# Altium PCB WCTopping.PcbDoc (part 2 of 2)
Units mil, origin at the board's own origin, x right, y up, seen from the top; angles counter-clockwise.
Board outline 4005 x 4000 mil, 2 copper layers (Top Layer, Bottom Layer), stack 12.8 mil thick; 56 components, 71 nets, 272 pads, 43 vias.
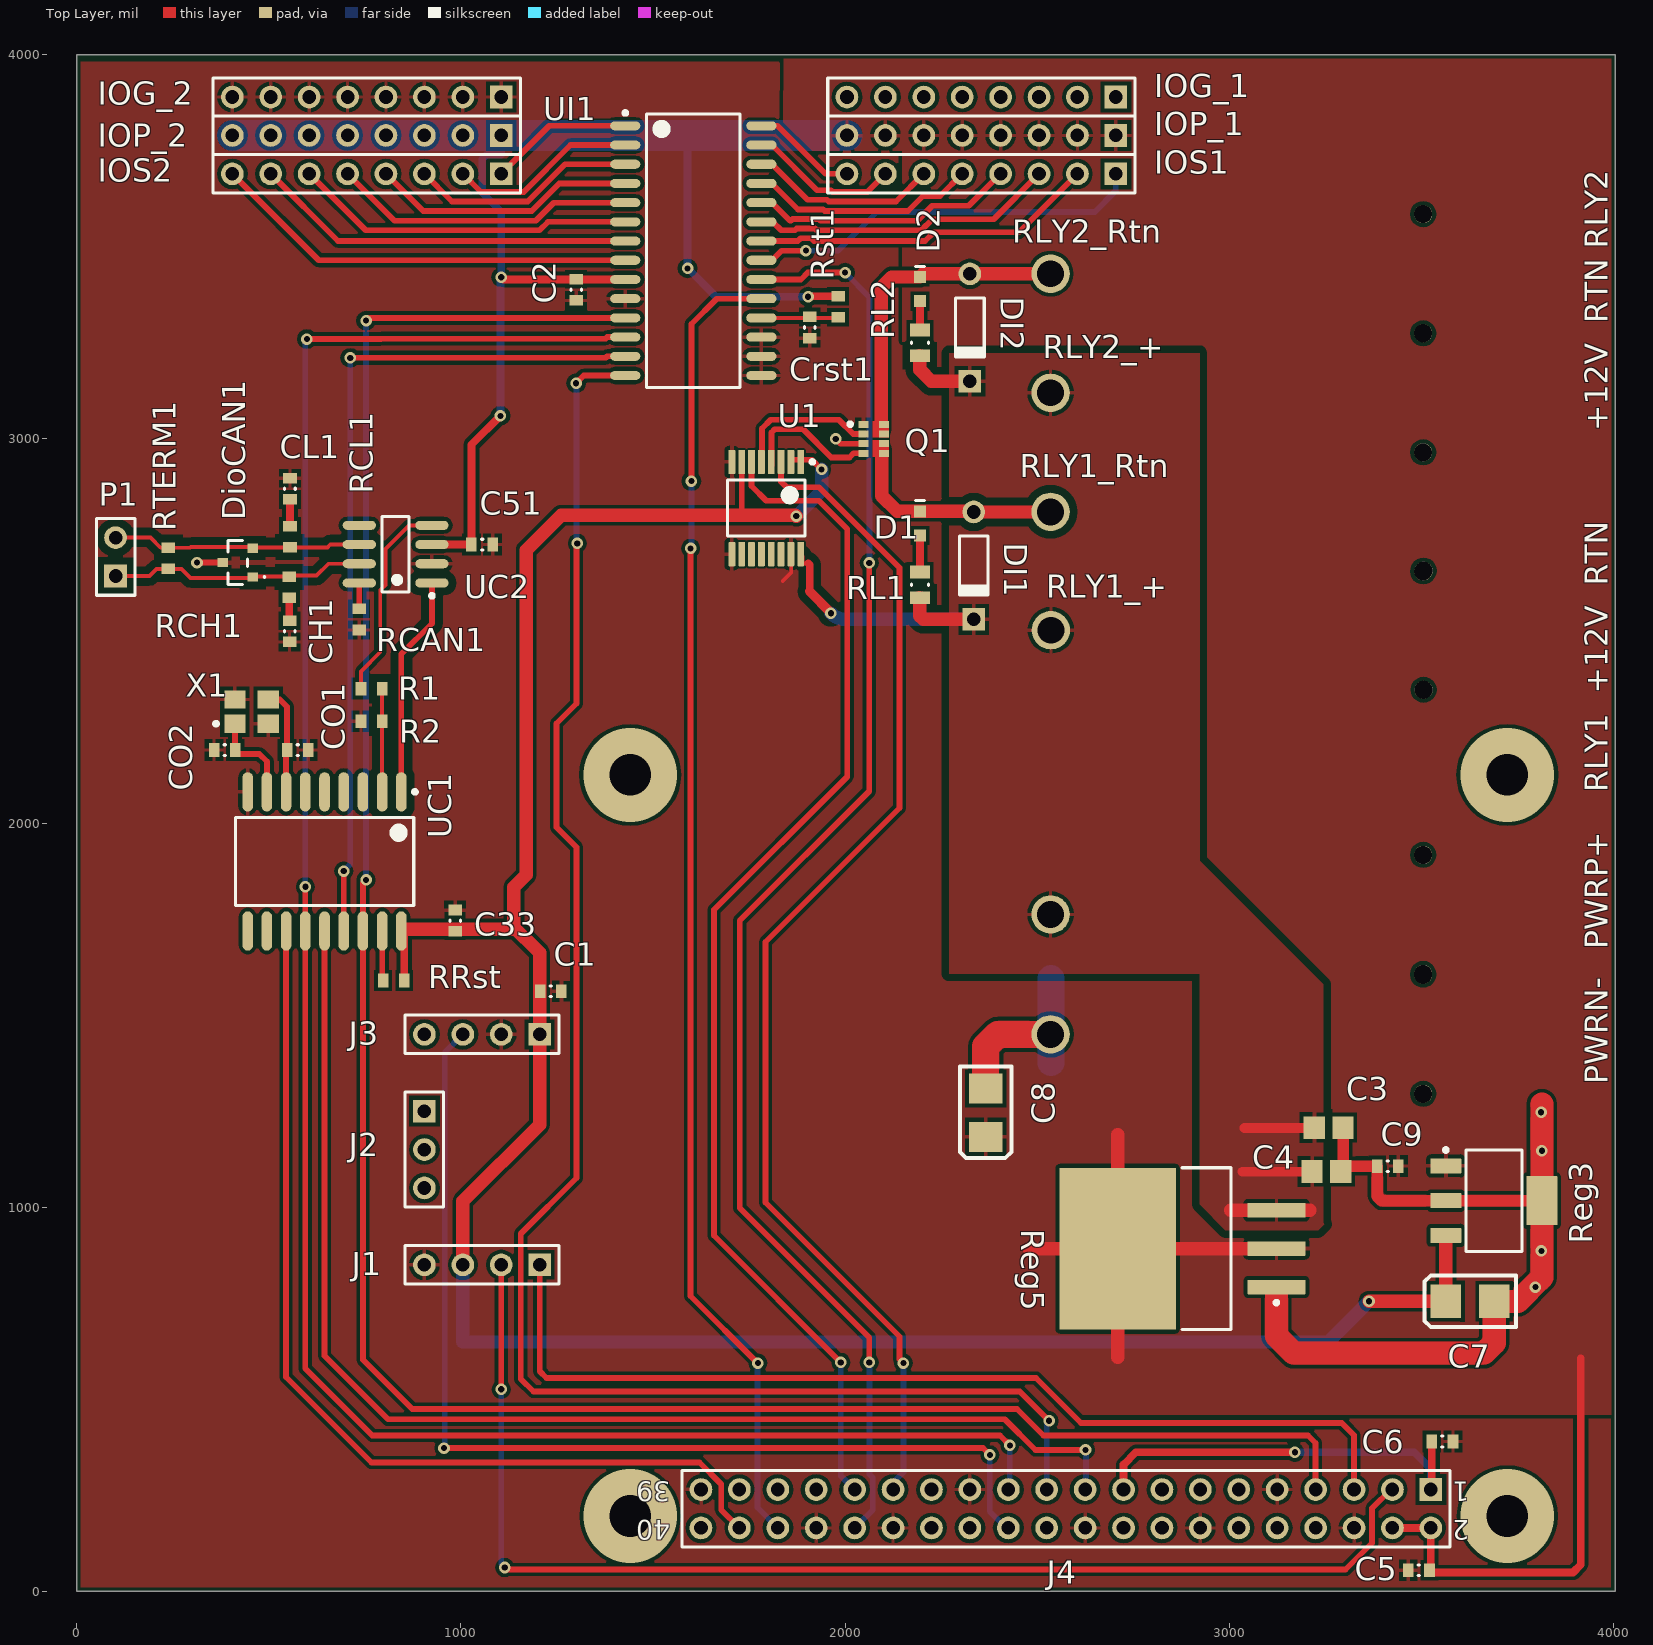
[diagram p0: Top Layer view]

## Part data (continued)
U1: library part CMP-1527-00010-2, "CMOS Quad Low-to-High Voltage Level Shifter, 3 to 18 V, -55 to 125 degC, 16-Pin TSSOP (PW16), RoHS, Tube", Manufacturer="Texas Instruments", Manufacturer Part Number=CD40109BPWR, Operating Temperature="-55°C ~ 125°C", Package / Case="16-TSSOP (0.173\", 4.40mm Width)", Package Reference=PW0016A, Standard Package=1, Supplier Device Package=16-TSSOP, Supplier Part Number 1=296-12163-6-ND, Temperature Range="-55 to 125 degC", Voltage - Supply="3 V ~ 18 V", Category="Integrated Circuits (ICs)", ComponentLink1Description="Manufacturer URL", ComponentLink1URL=www.ti.com, ComponentLink2Description=Datasheet, ComponentLink2URL=http://www.ti.com/lit/ds/symlink/cd40109b.pdf, ComponentLink3Description="Package Specification", ComponentLink3URL=http://www.ti.com/lit/ml/mpds361/mpds361.pdf, ComponentLink4Description=https://datasheet.ciiva.com/1899/cd40109b-1899236.pdf, ComponentLink4URL=https://datasheet.ciiva.com/1899/cd40109b-1899236.pdf, ComponentLink5Description=https://datasheet.ciiva.com/1899/cd40109b-1899237.pdf, ComponentLink5URL=https://datasheet.ciiva.com/1899/cd40109b-1899237.pdf, ComponentLink6Description=https://datasheet.ciiva.com/1899/cd40109b-1899238.pdf, ComponentLink6URL=https://datasheet.ciiva.com/1899/cd40109b-1899238.pdf, ComponentLink7Description=https://datasheet.ciiva.com/15096/getdatasheetpartid-50246-15096137.pdf, ComponentLink7URL=https://datasheet.ciiva.com/15096/getdatasheetpartid-50246-15096137.pdf, ComponentLink8Description=https://datasheet.ciiva.com/41455/001015415-da-01-en-ic-quad-lo-hi-v-cd40109bpwr-tssop-16-tid-41455340.pdf, ComponentLink8URL=https://datasheet.ciiva.com/41455/001015415-da-01-en-ic-quad-lo-hi-v-cd40109bpwr-tssop-16-tid-41455340.pdf, ComponentLink9Description=https://datasheet.ciiva.com/3305/cd40109b-mil-3305133.pdf, ComponentLink9URL=https://datasheet.ciiva.com/3305/cd40109b-mil-3305133.pdf, Data Rate=-, DatasheetVersion=SCHS099B, Differential - Input:Output=No/No, Dynamic Catalog=4000B, Family="Logic - Translators", Input Type=Voltage, Logic Function="Level Shifter, 3-State", Mounting Technology="Surface Mount", Number of Bits=4, Number of Channels=4, Number of Outputs=4, Number of Outputs/Channel=1, Other Names=296-12163-6, Output Type=Voltage, PackageDescription="16-Pin Plastic Small Outline Package, Body 5 x 4.4 mm, Pitch 0.65 mm", PackageVersion=4040064-4/G, Packaging=Digi-Reel®, Packing=Tube, PartNumber=CD40109BPW, Pricing 1="1=0.42, 10=0.36, 100=0.2688, 500=0.2111, 1000=0.1628 (USD)", Propagation Delay="240 ns Max.", Propagation Delay (Max)=240ns, RoHS=TRUE, Series=4000B, Stock 1=11025, Supplier 1=Digikey, VSS="3 to 18 V"
UC1: library part CMP-0186-00035-2, "Stand-Alone CAN Controller With SPI Interface, 18-Pin SOIC, Extended Temperature", Code_JEDEC=MS-013, ComponentLink1Description="Manufacturer URL", ComponentLink1URL=http://www.microchip.com/, ComponentLink2Description=Datasheet, ComponentLink2URL=http://ww1.microchip.com/downloads/en/DeviceDoc/21801f.pdf, ComponentLink3Description="Package Specification", ComponentLink3URL=http://www.microchip.com/stellent/groups/techpub_sg/documents/packagingspec/en012702.pdf, DatasheetVersion="revF, Oct-2010", PackageDescription="18-Lead Plastic Small Outline (SO) - Wide 7.50mm Body [SOIC]", PackageReference=SOIC-SO18, PackageVersion="revBB, Aug-2009", RevisionNote="URLs added. DatasheetVersion updated."
UC2: library part CMP-0186-00038-2, "High-Speed CAN Transceiver, 8-Pin SOIC, Extended Temperature", Code_IPC=SOIC127P600-8, Code_JEDEC=MS-012, ComponentLink1Description="Manufacturer URL", ComponentLink1URL=http://www.microchip.com/, ComponentLink2Description=Datasheet, ComponentLink2URL=http://ww1.microchip.com/downloads/en/DeviceDoc/21667F.pdf, ComponentLink3Description="Package Specification", ComponentLink3URL=http://www.microchip.com/stellent/groups/techpub_sg/documents/packagingspec/en012702.pdf, DatasheetVersion="revF, Jul-2010", PackageDescription="8-Lead Plastic Small Outline (SN) - Narrow, 3.90mm Body [SOIC]", PackageReference=SOIC-SN8, PackageVersion="revBB, Aug-2009", RevisionNote="URLs added. DatasheetVersion updated."
UI1: library part CMP-0186-00131-2, "16-Bit I/O Expander with Serial Interface, 28-Pin SOIC, Extended Temperature, Tape and Reel", Code_JEDEC=MS-013, ComponentLink1Description="Manufacturer URL", ComponentLink1URL=http://www.microchip.com/, ComponentLink2Description=Datasheet, ComponentLink2URL=http://ww1.microchip.com/downloads/en/DeviceDoc/21952b.pdf, ComponentLink3Description="Package Specification", ComponentLink3URL=http://www.microchip.com/stellent/groups/techpub_sg/documents/packagingspec/en012702.pdf, DatasheetVersion="revB, Feb-2007", PackageDescription="28-Lead Plastic Small Outline (SO) - Wide 7.50mm Body [SOIC]", PackageReference=SOIC-SO28, PackageVersion="revBB, Aug-2009", RevisionNote="URLs added. Sch pin type corrected."
X1: library part CMP-0464-00001-2, "Crystal, 16 MHz, -30 to 85 degC, 3.2 x 2.5 x 0.9 mm SMD", Frequency Tolerance="+/-20 ppm", Load Capacitance="10 pF", Manufacturer=ITTI, Nominal Frequency="16 MHz", Operating Temperature="-30 to 85 degC", ComponentLink1Description="Manufacturer URL", ComponentLink1URL=http://www.itti-co.com, Drive Level="100 max. uw", Mounting Technology="Surface Mount", Overtone order=Fundamental, PackageDescription="4-Pin Hand Drawn, Body 3.2 x 2.5mm", PackageReference=21C00047-16.000MHz-4, PartNumber=21C00047-16.000MHz

## Via types
v1: diameter 30, hole 16, Top Layer to Bottom Layer, 39 vias
v2: diameter 244.09, hole 108.27, Top Layer to Bottom Layer, 4 vias

## Nets (pads, with @x,y where several pads share a name; then routed paths per layer and width w, separated by ;. In a path a pad name is that pad's centre, name@x,y a point inside that pad or via, vN(x,y) a via of type N, cw(c..) or ccw(c..) an arc to the next point about the centre after c; other vN are vias at no path point)
3V3: C6.2 J4.1 J4.17 | length 1076.1
  Top Layer w20: J4.17 2725,330 2757,362 v1(3171,362) ; J4.1 3527.44,267.44 C6.2
  Bottom Layer w20: v1(3171,362) 3482,362 3525,319 J4.1
3V3bd: C1.2 C7.1 C33.2 J1.3 J3.1 Reg3.3 RRst.2 U1.1 U1.2 U1.7 UC1.18 | length 6509.2
  Top Layer w15: U1.7 1731.02,2809.02 1739.05,2801 ; U1.2 1864.9,2946 1913.51,2946 v1(1939,2920.51)
  Top Layer w20: RRst.2 UC1.18@852.56,1711.34
  Top Layer w35: UC1.18@850.1,1724 1138,1724 1138,1833 1170,1865 1170,2710 1261,2801 1739.05,2801 1871,2801 v1(1873,2799) ; J1.3@1002,847 J1.3 1005,1015 1205,1215 J3.1 1205,1662 1134,1733 ; v1(3364,755) C7.1 Reg3.3
  Bottom Layer w35: J1.3 1005,649 3258,649 v1(3364,755) ; v1(1873,2799) 1939,2865 v1(1939,2920.51)
5V: C2.2 C5.2 C8.1 C9.2 C51.2 IOP_1.1 IOP_1.2 IOP_1.3 IOP_1.4 IOP_1.5 IOP_1.6 IOP_1.7 IOP_1.8 IOP_2.1 IOP_2.2 IOP_2.3 IOP_2.4 IOP_2.5 IOP_2.6 IOP_2.7 IOP_2.8 J4.2 J4.4 Reg3.1 Reg5.2 Reg5.4 Rst1.2 UC2.3 UI1.9 | length 6341.5
  Top Layer w20: UC2.3 C51.2 1027.44,2984.44 v1(1103,3060) ; v1(1105,3421) 1111,3415 UI1.9 ; v1(1904,3370) 1905.56,3371.56 Rst1.2 ; J4.4 J4.2 3525,49 3895,49 3915,69 3915,607
  Top Layer w35: 2479,892 Reg5.4 ; 2709.71,609.29 Reg5.4 ; 2709.71,1188.29 Reg5.4 ; Reg5.2 Reg5.4
  Bottom Layer w20: v1(1103,3060) 1103,3419 v1(1105,3421) 1105,3590.94 1055.47,3640.47 1055.47,3727.81 1067.19,3739.53 1105,3739.53 IOP_2.1 ; 1570,3790 1590,3770 v1(1590,3444) 1664,3370 v1(1904,3370)
  Bottom Layer w80: IOP_2.8 IOP_2.7 IOP_2.6 IOP_2.5 IOP_2.4 IOP_2.3 IOP_2.2 IOP_2.1 1570,3790 IOP_1.8
12V: C3.2 C4.2 DI1.2 DI2.2 PWRP+.1 Reg5.3 RL1.2 RL2.2 RLY1_+.1 RLY2_+.1 U1.16 | length 1509.1
  Top Layer w10: U1.16 1890,2694.49 1890,2680 1894,2676 1904,2676
  Top Layer w20: 1904,2676 1908.08,2671.92 1908.08,2602.92 1909.5,2601.5
  Top Layer w25: 1908.08,2602.92 v1@1964,2547 ; 3034,1092 C4.2@3215.6,1092 ; 3040,1206 C3.2@3221.6,1206
  Top Layer w35: RL1.2 2195,2539 2203.76,2530.24 DI1.2 ; RL2.2 2195,3180 2224.76,3150.24 DI2.2 ; 3004,992 Reg5.3 3210,992
  Bottom Layer w35: v1(1963,2546) ccw(c2001.06,2584.06) 2001.06,2530.24 DI1.2
AUX_CL: J2.1
AUX_DA: J2.3
C\S\: J3.3 J4.24 | length 2738.6
  Top Layer w15: v1(956,373) 2359,373 v1(2377,355)
  Bottom Layer w15: v1(956,373) 957.97,374.97 957.97,1402.97 J3.3 ; v1(2377,355) 2377,208 2420,165 J4.24
CAN_RXD: R1.2 R2.2 UC1.2 | length 268.9
  Top Layer w10: UC1.2 R2.2 R1.2
CAN_TXD: UC1.1 UC2.1 | length 579.6
  Top Layer w15: UC1.1@843.03,2083.07 UC1.1 845,2440 924.49,2519.49 UC2.1
CANH: DioCAN1.1 P1.1 RCH1.2 RTERM1.2 UC2.7 | length 671.8
  Top Layer w10: P1.1 189,2643 207.44,2661.44 272.99,2661.44 296.43,2638 455.77,2638 DioCAN1.1 459.33,2641.56 RCH1.2 ; RCH1.2@550,2637.56 556.81,2644.37 624.37,2644.37 655,2675 UC2.7
CANL: DioCAN1.2 P1.2 RCL1.2 RTERM1.1 UC2.6 | length 652.2
  Top Layer w10: P1.2 192,2743 218.44,2716.56 294.99,2716.56 297.43,2719 454.77,2719 DioCAN1.2 460.41,2717.44 RCL1.2 RCL1.2 624.37,2717.4 ; 624.21,2717.56 624.37,2717.4 ; UC2.6 660,2725 652.4,2717.4 624.37,2717.4
FSYNC: J2.2
GND: C1.1 C2.1 C3.1 C4.1 C5.1 C6.1 C7.2 C8.2 C9.1 C33.1 C51.1 CH1.2 CL1.1 CO1.1 CO2.2 Crst1.1 DioCAN1.3 IOG_1.1 IOG_1.2 IOG_1.3 IOG_1.4 IOG_1.5 IOG_1.6 IOG_1.7 IOG_1.8 IOG_2.1 IOG_2.2 IOG_2.3 IOG_2.4 IOG_2.5 IOG_2.6 IOG_2.7 IOG_2.8 J1.4 J3.2 J4.6 J4.9 J4.14 J4.20 J4.25 J4.30 J4.34 J4.39 PWRN-.1 Q1.1 Q1.3 R2.1 RCAN1.1 Reg3.2 Reg3.4 Reg5.1 U1.8 U1.9 U1.15 UC1.9 UC2.2 UI1.10 UI1.15 UI1.16 UI1.17 X1.2 X1.4 | length 2841
  Top Layer w10: 1838,2630 1860,2652 U1.15@1860,2675
  Top Layer w15: v1(313,2678) DioCAN1.3 ; v1(1976,3000) 1988.5,2987.5 Q1.3
  Top Layer w30: C4.1 3296.4,1099 C4.1@3296.4,1107 ; C3.1 C4.1@3296.4,1107 ; Reg3.4 Reg3.2 3397,1017 3385.44,1028.56 C9.1 C4.1@3296.4,1107
  Top Layer w60: Reg5.1@3123.09,775 3123.09,664.91 3168,620 3663,620 3689.99,646.99 C7.2 3752,755 3814,817 Reg3.4 3814,1268
  Top Layer w70: C8.2 2366,1418 2398,1450 PWRN-.1
  Bottom Layer w70: 2536,1376 2536,1595
  other v1: 3797,792 3813,886 3814,1147 3812,1247
GPIO2: J1.2 J4.3 | length 3244.1
  Top Layer w15: v1(1105,526) J1.2 ; v1(1114,62) 1119.48,56.52 3302.52,56.52 3372.03,126.03 3372.03,216.03 3421,265 J4.3
  Bottom Layer w15: v1(1105,526) 1105,71 v1(1114,62)
GPIO3: J1.1 J4.5 | length 2607.2
  Top Layer w15: J1.1 1205,573 1223,555 2497,555 2614,438 3293,438 3325,406 J4.5
GPIO4: J4.7 UC1.16 UI1.11 | length 6076.9
  Top Layer w15: v1(753,1852) 745,1844 UC1.16 745,603 873.5,474.5 2447.5,474.5 2516.5,405.5 3205.5,405.5 3225,386 J4.7 ; v1(753,3308) 760,3315 UI1.11
  Bottom Layer w15: v1(753,1852) v1(753,3308)
GPIO7: J4.26
GPIO12: J4.32 UI1.20 | length 3821.8
  Top Layer w15: UI1.20 1885,3415 1903,3433 v1(2000,3433) ; v1(2063,596) 2063,661 1726,998 1726,1746 2063,2083 v1(2063,2677)
  Bottom Layer w15: v1(2000,3433) 2064,3369 v1@2064,2677 ; J4.32 2072.03,212.03 2072.03,296.51 2064,304.53 v1@2064,596
GPIO13: J4.33
GPIO14: J4.8
GPIO15: J4.10
GPIO16: J4.36 UI1.19 | length 3438.8
  Top Layer w15: v1(1598,2715) 1598,769 v1(1773,594) ; v1(1600,2890) 1600,3299 1666,3365 UI1.19
  Bottom Layer w15: v1(1598,2715) 1600,2717 v1(1600,2890) ; v1@1772.03,594 1772.03,217.97 J4.36
GPIO17: J4.11
GPIO18: J4.12
GPIO19: J4.35
GPIO20: J4.38 UC1.12 | length 2542.6
  Top Layer w15: UC1.12 545,558 767.39,335.61 1620.89,335.61 1677.97,278.53 1677.97,212.03 J4.38
GPIO22: J4.15
GPIO23: J4.16
GPIO24: J4.18
GPIO25: J4.22
GPIO26: J4.37
GPIO27: J4.13
ID_SC: J4.28
ID_SD: J4.27
INT: J3.4
IOA_0: IOS1.1 UI1.21 | length 1041.8
  Top Layer w15: UI1.21 1809.73,3465 1834.73,3490 v1(1898,3490)
  Bottom Layer w15: v1(1898,3490) 1982,3490 2083,3591 2650,3591 2705,3646 IOS1.1
IOA_1: IOS1.2 UI1.22 | length 901.5
  Top Layer w15: UI1.22 1877.04,3515 1884.54,3522.5 1911.46,3522.5 1918.96,3515 2208,3515 2231,3538 2453,3538 IOS1.2
IOA_2: IOS1.3 UI1.23 | length 796.6
  Top Layer w15: UI1.23 1812.06,3565 1834.09,3542.97 1869.66,3542.97 1874.18,3547.5 1921.82,3547.5 1926.34,3542.97 2198.33,3542.97 2227.36,3572 2387,3572 IOS1.3
IOA_3: IOS1.4 UI1.24 | length 696.6
  Top Layer w15: UI1.24 1809.73,3615 1856.75,3567.97 1859.3,3567.97 1863.83,3572.5 1932.17,3572.5 1936.7,3567.97 2187.97,3567.97 2227,3607 2322,3607 IOS1.4
IOA_4: IOS1.5 UI1.25 | length 592.9
  Top Layer w15: UI1.25 1809.73,3665 1877.23,3597.5 1942.53,3597.5 1947.06,3592.97 2164,3592.97 2203.03,3632 2247,3632 IOS1.5
IOA_5: IOS1.6 UI1.26 | length 492.9
  Top Layer w15: UI1.26 1809.73,3715 1902.23,3622.5 1952.88,3622.5 1957.41,3617.97 2132.97,3617.97 IOS1.6
IOA_6: IOS1.7 UI1.27 | length 392.9
  Top Layer w15: UI1.27 1809.73,3765 1927.23,3647.5 1963.24,3647.5 1967.77,3642.97 2057.97,3642.97 IOS1.7
IOA_7: IOS1.8 UI1.28 | length 274.6
  Top Layer w15: UI1.28 1824,3815 1949,3690 IOS1.8
IOB_0: IOS2.1 UI1.1 | length 374.6
  Top Layer w15: IOS2.1 1230,3815 UI1.1
IOB_1: IOS2.2 UI1.2 | length 492.9
  Top Layer w15: IOS2.2 1052.03,3642.97 1163.51,3642.97 1285.54,3765 UI1.2
IOB_2: IOS2.3 UI1.3 | length 592.9
  Top Layer w15: IOS2.3 977.03,3617.97 1173.87,3617.97 1270.9,3715 UI1.3
IOB_3: IOS2.4 UI1.4 | length 692.9
  Top Layer w15: IOS2.4 902.03,3592.97 1184.22,3592.97 1256.25,3665 UI1.4
IOB_4: IOS2.5 UI1.5 | length 792.9
  Top Layer w15: IOS2.5 827.03,3567.97 1194.58,3567.97 1241.61,3615 UI1.5
IOB_5: IOS2.6 UI1.6 | length 892.9
  Top Layer w15: IOS2.6 752.03,3542.97 1204.93,3542.97 1226.96,3565 UI1.6
IOB_6: IOS2.7 UI1.7 | length 995.3
  Top Layer w15: IOS2.7 680,3515 UI1.7
IOB_7: IOS2.8 UI1.8 | length 1116
  Top Layer w15: IOS2.8 630,3465 UI1.8
NetCH1_1: CH1.1 RCH1.1 | length 60.3
  Top Layer w20: RCH1.1 553,2527.56 CH1.1
NetCL1_2: CL1.2 RCL1.1 | length 69.9
  Top Layer w20: RCL1.1 CL1.2
NetCO1_2: CO1.2 UC1.7 X1.3 | length 279.4
  Top Layer w15: X1.3 528.5,2321.5 547.44,2302.56 CO1.2 545,2187.56 UC1.7
NetCO2_1: CO2.1 UC1.8 X1.1 | length 242.6
  Top Layer w15: X1.1 411.69,2190.87 CO2.1 422.56,2180 475,2180 495,2160 UC1.8
NetCrst1_2: Crst1.2 Rst1.1 UI1.18 | length 200.4
  Top Layer w10: UI1.18 1980.56,3315 Rst1.1
NetD1_1: D1.1 DI1.1 Q1.5 Q1.6 RLY1_Rtn.1 | length 577.6
  Top Layer w35: 2095,2972 2095,2852 2135.5,2811.5 D1.1 2333.27,2811.5 DI1.1 2534.76,2809.76 RLY1_Rtn.1
NetD1_2: D1.2 RL1.1 | length 95
  Top Layer w20: RL1.1 D1.2
NetD2_1: D2.1 DI2.1 Q1.7 Q1.8 RLY2_Rtn.1 | length 825.9
  Top Layer w35: 2094,3024 2094,3394 2121.5,3421.5 D2.1 2203.27,3429.76 DI2.1 2534.76,3429.76 RLY2_Rtn.1
NetD2_2: D2.2 RL2.1 | length 75
  Top Layer w20: RL2.1 D2.2
NetQ1_2: Q1.2 U1.5 | length 376.9
  Top Layer w15: U1.5 1783.56,2941.44 1783.56,3026.92 1806.64,3050 1983.8,3050 2021.3,3012.5 Q1.2
NetQ1_4: Q1.4 U1.4 | length 363.2
  Top Layer w15: U1.4@1808.56,2931.08 1808.56,3016.56 1817,3025 1891,3025 1964.22,2951.78 2011.59,2951.78 2022.3,2962.5 Q1.4
NetR1_1: R1.1 UC2.4 | length 536.3
  Top Layer w10: R1.1 739.88,2394.88 790,2445 790,2606.26 803.82,2620.08 803.82,2713.82 865,2775 UC2.4
NetRCAN1_2: RCAN1.2 UC2.8 | length 67.7
  Top Layer w15: RCAN1.2 735.51,2558.07 UC2.8
NetRRst_1: RRst.1 UC1.17 | length 136.5
  Top Layer w15: RRst.1@795,1582.44 UC1.17
RELAY1: J4.29 U1.3 | length 3164.1
  Top Layer w15: U1.3@1833.56,2940.08 1833.56,2888.44 1848,2874 1932.36,2874 2141.91,2664.45 2141.91,2038.91 1793,1690 1793,1011.91 2141.91,663 2141.91,604.09 v1(2152,594)
  Bottom Layer w15: J4.29 2116,274 2152,310 v1(2152,594)
RELAY2: J4.31 U1.6 | length 3153.5
  Top Layer w15: U1.6 1756.61,2877.39 1795,2839 1932,2839 2005.5,2765.5 2005.5,2120.5 1659,1774 1659,926 v1(1989,596)
  Bottom Layer w15: v1(1989,596) 1989,301 J4.31
SPI_MISO: J4.21 UI1.14 | length 4434.3
  Top Layer w15: v1(1300,3145) 1320,3165 UI1.14 ; v1(1303,2728) 1301.12,2726.12 1301.12,2311.12 1249,2259 1249,1989.12 1301.12,1937 1301.12,1076.12 1156,931 1156,553 1189,520 2455,520 v1(2531,444)
  Bottom Layer w15: v1(1300,3145) 1301.12,3143.88 v1@1301.12,2728 ; J4.21 2525,438 v1(2531,444)
SPI_MOSI: J4.19 UC1.14 | length 3294
  Top Layer w15: UC1.14 645,613 810,448 2416,448 2496,368 v1(2626,368)
  Bottom Layer w15: J4.19 2627,267 v1@2627,367 ; v1(2626,368) v1@2627,367 ; v1@2628,366 v1@2627,367
SPI_MOSIA: UC1.15 UI1.13 | length 2255.3
  Top Layer w15: UC1.15@695,1680.19 UC1.15 v1(695,1875) ; v1(712,3211) 1376.96,3211 1380.96,3215 UI1.13
  Bottom Layer w15: v1(695,1875) 712,1892 v1(712,3211)
SPI_SCLK: J4.23 UC1.13 UI1.12 | length 5548.4
  Top Layer w15: v1(595,1834) UC1.13 595,580 769.5,405.5 2403.5,405.5 v1(2429,380) ; v1(599,3260) 792,3260 793,3261 1376.96,3261 1380.96,3265 UI1.12
  Bottom Layer w15: v1(595,1834) 595,3260 v1(599,3260) ; J4.23 2429,269 v1(2429,380)
pads on no net: J4.40 PWRN-.MH PWRP+.MH RLY1_+.MH RLY1_Rtn.MH RLY2_+.MH RLY2_Rtn.MH U1.10 U1.11 U1.12 U1.13 U1.14 UC1.3 UC1.4 UC1.5 UC1.6 UC1.10 UC1.11 UC2.5
copper on no net:
  other v2: 1440.67,196.07 3724.13,196.07 1440.67,2125.2 3724.13,2125.2

## Polygon pours and split planes (outlines as drawn)
GND on Bottom Layer "GND_Bot" (solid, pour order 8): -5,4001 3995,4001 4006,3990 4006,0 11,0 -5,-16
5V on Bottom Layer "5V_Bot" (solid, pour order 4): 3640.97,625.97 3656,641 3656,1573 2661,1573 2661,1330 2298,1330 2298,1572.71 1343,1573 1331.41,627.97
5V on Top Layer "5V_Bot" (solid, pour order 6): 3600.47,585.47 3600.47,1575 1823,1575 1823,1018 2182,669 2182,586.7
12V on Top Layer "12V_Top" (solid, pour order 2): 2271.02,3223 2923,3223 2923,1902 3245,1580 3245,959 3248,956 3232,940 2990,940 2923,1007 2923,1249 2923,1608 2452,1608 2271.02,1608 2271.02,1763
5V on Top Layer "5V_Top" (solid, remove dead copper, pour order 10): 1840.66,4000.01 4001,4001 4001,459 1808,459 1808,2152 2148.55,2492.55 2148.55,3750 1839,3750
GND on Top Layer "gnd_Top" (solid, pour order 12): 11,3982 11,0 22,11 3993,11 3993,3970 4005,3982

## Silkscreen, mask and mechanical layers (free items; w line width, h text height)
Top Overlay:
  text "+12V  RTN RLY2" at 3985,3020 h60 r90
  text "RLY1  +12V  RTN" at 3985,2080 h60 r90
  text "Altium Advanced Training: '.Pcb_File_Name_No_Path'" at 8,-210.68 h100
Board Outline:
  the board outline again, w3

## Text inside footprints (layer, text, board x,y; h text height)
J4: Top Overlay "1" at 3625,285 h50 r180; Top Overlay "2" at 3625,185 h50 r180; Top Overlay "40" at 1545,185 h50 r180; Top Overlay "39" at 1545,285 h50 r180